# Allegro board test-bsp_01v1.brd
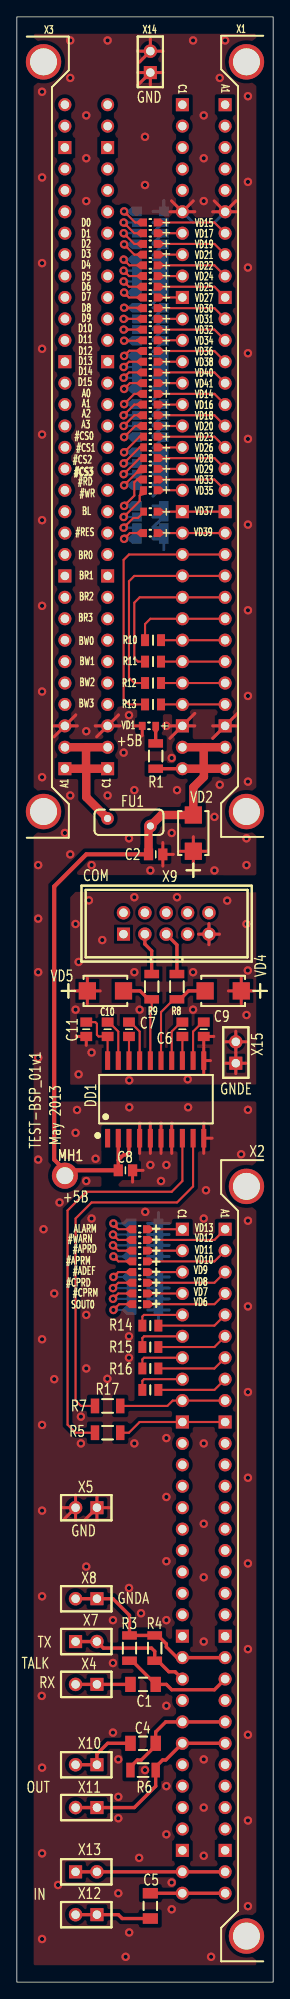
[diagram p0: board, top side]
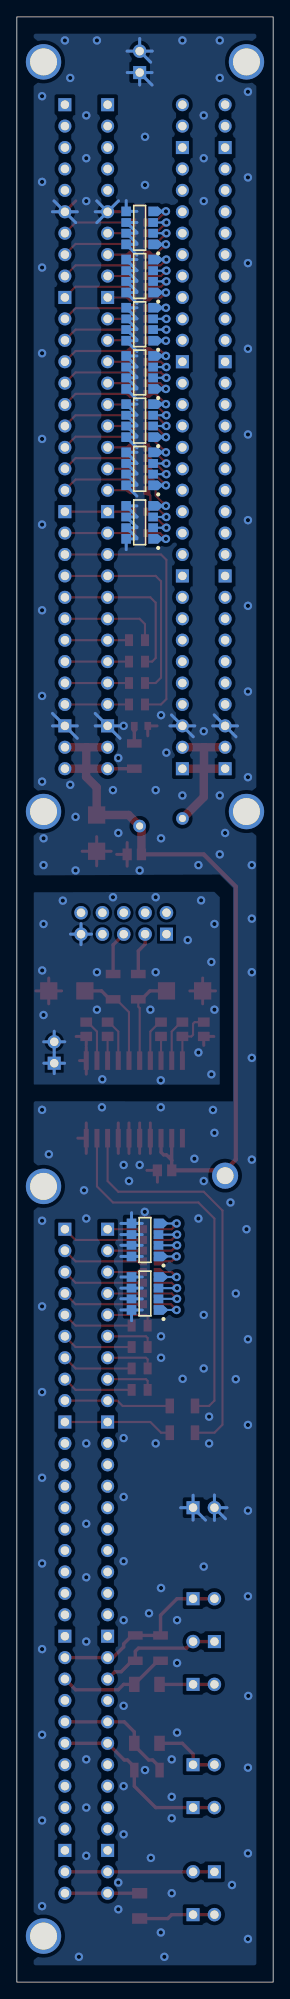
[diagram p1: board, bottom side, seen from below]

Outline 30.48 x 233.04 mm; copper layers: TOP, BOTTOM. Coordinates in mm from the lower left corner of the outline.
Outline path: rectangle 0,0 30.48,233.04

## Placement (name value [footprint] x y rotation side)
C1  10,0u  [CAPC3216X180N]  15.01 35.31 180 top
C2  0,1u  [CAPC2013X95N]  16.51 133.73 0 top
C4  1,0u  [CAPC3216X95N]  15.01 28.32 180 top
C5  1,0u  [CAPC3216X95N]  15.88 9.04 270 top
C6  0,1u  [CAPC2013X95N]  19.69 112.99 270 top
C7  0,1u  [CAPC2013X95N]  13.34 112.99 90 top
C8  0,1u  [CAPC2013X95N]  12.92 96.27 0 top
C9  0,1u  [CAPC2013X95N]  22.23 112.99 270 top
C10  0,1u  [CAPC2013X95N]  10.79 112.99 270 top
C11  0,1u  [CAPC2013X95N]  8.25 112.99 270 top
DD1  ADM3251  [SOIC127P1032X265-20]  10.79 100.08 0 top
FU1  1.1A  [FUSRR510W50L820T300H1400USR]  13.34 137.54 0 top
MH1  +48B  [MTG_180_310]  5.71 95.63 90 top
R1  1k  [RESC3116X65N]  16.51 145.39 90 top
R3  1k  [RESC3116X65N]  13.4 39.61 270 top
R4  1k  [RESC3116X65N]  16.4 39.61 270 top
R5  510  [RESC3116X65N]  10.79 65.15 0 top
R6  1k  [RESC3116X65N]  15.01 25.15 180 top
R7  100  [RESC3116X65N]  10.79 68.33 0 top
R8  100  [RESC3116X65N]  19.04 118.04 270 top
R9  100  [RESC3116X65N]  16.04 118.04 270 top
R10  100  [RESC2013X60N]  16.2 159.13 180 top
R11  100  [RESC2013X60N]  16.2 156.59 180 top
R12  100  [RESC2013X60N]  16.2 154.05 180 top
R13  100  [RESC2013X60N]  16.2 151.51 180 top
R14  100  [RESC2013X60N]  15.88 77.85 0 top
R15  100  [RESC2013X60N]  15.88 75.31 0 top
R16  100  [RESC2013X60N]  15.88 72.77 0 top
R17  100  [RESC2013X60N]  15.88 70.23 0 top
RR3  4.7k  [RESCAX127P320X508X70-8N]  15.24 81.66 0 bottom
RR4  4.7k  [RESCAX127P320X508X70-8N]  15.24 88.01 0 bottom
RR5  4.7k  [RESCAX127P320X508X70-8N]  15.88 185.17 0 bottom
RR6  4.7k  [RESCAX127P320X508X70-8N]  15.88 208.03 0 bottom
RR7  4.7k  [RESCAX127P320X508X70-8N]  15.88 202.31 0 bottom
RR8  4.7k  [RESCAX127P320X508X70-8N]  15.88 179.45 0 bottom
RR9  4.7k  [RESCAX127P320X508X70-8N]  15.88 196.6 0 bottom
RR10  4.7k  [RESCAX127P320X508X70-8N]  15.88 173.1 0 bottom
RR11  4.7k  [RESCAX127P320X508X70-8N]  15.88 190.88 0 bottom
VD1  green  [LEDC1608X110N]  15.71 148.97 0 top
VD2  6.8B  [DIOM5236X261N]  20.99 136.25 270 top
VD4  18B  [DIOM5236X261N]  24.54 117.54 0 top
VD5  18B  [DIOM5236X261N]  10.54 117.54 180 top
VD6  green  [LEDC1608X110N]  14.61 80.39 0 top
VD7  green  [LEDC1608X110N]  14.61 81.66 0 top
VD8  green  [LEDC1608X110N]  14.61 82.93 0 top
VD9  green  [LEDC1608X110N]  14.61 84.2 0 top
VD10  green  [LEDC1608X110N]  14.61 85.47 0 top
VD11  green  [LEDC1608X110N]  14.61 86.74 0 top
VD12  green  [LEDC1608X110N]  14.61 88.01 0 top
VD13  green  [LEDC1608X110N]  14.61 89.28 0 top
VD14  green  [LEDC1608X110N]  15.88 188.34 0 top
VD15  green  [LEDC1608X110N]  15.88 208.66 0 top
VD16  green  [LEDC1608X110N]  15.88 187.07 0 top
VD17  green  [LEDC1608X110N]  15.88 207.39 0 top
VD18  green  [LEDC1608X110N]  15.88 185.8 0 top
VD19  green  [LEDC1608X110N]  15.88 206.12 0 top
VD20  green  [LEDC1608X110N]  15.88 184.53 0 top
VD21  green  [LEDC1608X110N]  15.88 204.85 0 top
VD22  green  [LEDC1608X110N]  15.88 203.58 0 top
VD23  green  [LEDC1608X110N]  15.88 183.26 0 top
VD24  green  [LEDC1608X110N]  15.88 202.31 0 top
VD25  green  [LEDC1608X110N]  15.88 201.04 0 top
VD26  green  [LEDC1608X110N]  15.88 181.99 0 top
VD27  green  [LEDC1608X110N]  15.88 199.77 0 top
VD28  green  [LEDC1608X110N]  15.88 180.72 0 top
VD29  green  [LEDC1608X110N]  15.88 179.45 0 top
VD30  green  [LEDC1608X110N]  15.88 198.5 0 top
VD31  green  [LEDC1608X110N]  15.88 197.23 0 top
VD32  green  [LEDC1608X110N]  15.88 195.96 0 top
VD33  green  [LEDC1608X110N]  15.88 178.18 0 top
VD34  green  [LEDC1608X110N]  15.88 194.69 0 top
VD35  green  [LEDC1608X110N]  15.88 176.91 0 top
VD36  green  [LEDC1608X110N]  15.88 193.42 0 top
VD37  green  [LEDC1608X110N]  15.88 174.37 0 top
VD38  green  [LEDC1608X110N]  15.88 192.15 0 top
VD39  green  [LEDC1608X110N]  15.88 171.83 0 top
VD40  green  [LEDC1608X110N]  15.88 190.88 0 top
VD41  green  [LEDC1608X110N]  15.88 189.61 0 top
X1  DIN-32x2FR  [DIN_41612_64_FR]  27.94 183.26 180 top
X2  DIN-32x2FR  [DIN_41612_64_FR]  27.94 49.91 180 top
X3  DIN-32x2  [DIN_41612_64_MR]  2.54 183.26 0 top
X4  RxTalk  [HDRV1X2P254]  8.25 35.31 180 top
X5  GND  [HDRV1X2P254]  8.25 56.26 180 top
X7  TxTalk  [HDRV1X2P254]  8.25 40.39 0 top
X8  GNDA  [HDRV1X2P254]  8.25 45.47 180 top
X9  IDC-10M  [IDC_10M]  17.77 125.54 90 top
X10  BSP_OUT+  [HDRV1X2P254]  8.25 25.78 180 top
X11  BSP_OUT-  [HDRV1X2P254]  8.25 20.7 180 top
X12  BSP_IN-  [HDRV1X2P254]  8.25 8 180 top
X13  BSP_IN+  [HDRV1X2P254]  8.25 13.08 0 top
X14  PLS-2  [HDRV1X2P254]  15.88 227.71 90 top
X15  PLS-2  [HDRV1X2P254]  26.04 110.24 90 top

## Library data of the parts
C1 C2 C4-C11 = CAP_NP
DD1 = ADM3251_RW20
FU1 = FUSE_LEAD
MH1 = MOUNTING_HOLE_PLATED
R1 R3-R9 = RES_0.25W
R10-R17 = RES_0.125W
RR3-RR11 = RES_ARRAY_4
VD1 VD6-VD41 = DIODE_LED
VD2 = DIODE_TVS_UNI
VD4 VD5 = DIODE_TVS_BI
X1 X2 = CON_32X2
X3 = CON_32x2
X4 X5 X7 X8 X10-X15 = CON_2
X9 = CON_10

## Footprints (pads in the part's own frame, mm; a bottom-side part is the same pattern mirrored in y, then rotated)
CAPC2013X95N
  rect 1.1x1.4 smd: 1(-0.85,0) 2(0.85,0)
CAPC3216X95N
  rect 1.25x1.8 smd: 1(-1.5,0) 2(1.5,0)
CAPC3216X180N
  rect 1.25x1.8 smd: 1(-1.5,0) 2(1.5,0)
DIN_41612_64_FR
  rect 1.55x1.55 hole 1: A1(3.175,-39.37) A10(3.175,-16.51) A20(3.175,8.89) A30(3.175,34.29) C1(8.255,-39.37) C10(8.255,-16.51) C20(8.255,8.89) C30(8.255,34.29)
  round 1.55 hole 1: A2(3.175,-36.83) A3(3.175,-34.29) A4(3.175,-31.75) A5(3.175,-29.21) A6(3.175,-26.67) A7(3.175,-24.13) A8(3.175,-21.59) A9(3.175,-19.05) A11(3.175,-13.97) A12(3.175,-11.43) A13(3.175,-8.89) A14(3.175,-6.35) A15(3.175,-3.81) A16(3.175,-1.27) A17(3.175,1.27) A18(3.175,3.81) A19(3.175,6.35) A21(3.175,11.43) A22(3.175,13.97) A23(3.175,16.51) A24(3.175,19.05) A25(3.175,21.59) A26(3.175,24.13) A27(3.175,26.67) A28(3.175,29.21) A29(3.175,31.75) A31(3.175,36.83) A32(3.175,39.37) C2(8.255,-36.83) C3(8.255,-34.29) C4(8.255,-31.75) C5(8.255,-29.21) C6(8.255,-26.67) C7(8.255,-24.13) C8(8.255,-21.59) C9(8.255,-19.05) C11(8.255,-13.97) C12(8.255,-11.43) C13(8.255,-8.89) C14(8.255,-6.35) C15(8.255,-3.81) C16(8.255,-1.27) C17(8.255,1.27) C18(8.255,3.81) C19(8.255,6.35) C21(8.255,11.43) C22(8.255,13.97) C23(8.255,16.51) C24(8.255,19.05) C25(8.255,21.59) C26(8.255,24.13) C27(8.255,26.67) C28(8.255,29.21) C29(8.255,31.75) C31(8.255,36.83) C32(8.255,39.37)
  round 4.2 hole 3.2: HOLE1(0.635,-44.45) HOLE2(0.635,44.45)
DIN_41612_64_MR
  rect 1.55x1.55 hole 1: A1(3.175,-39.37) A10(3.175,-16.51) A20(3.175,8.89) A30(3.175,34.29) C1(8.255,-39.37) C10(8.255,-16.51) C20(8.255,8.89) C30(8.255,34.29)
  round 1.55 hole 1: A2(3.175,-36.83) A3(3.175,-34.29) A4(3.175,-31.75) A5(3.175,-29.21) A6(3.175,-26.67) A7(3.175,-24.13) A8(3.175,-21.59) A9(3.175,-19.05) A11(3.175,-13.97) A12(3.175,-11.43) A13(3.175,-8.89) A14(3.175,-6.35) A15(3.175,-3.81) A16(3.175,-1.27) A17(3.175,1.27) A18(3.175,3.81) A19(3.175,6.35) A21(3.175,11.43) A22(3.175,13.97) A23(3.175,16.51) A24(3.175,19.05) A25(3.175,21.59) A26(3.175,24.13) A27(3.175,26.67) A28(3.175,29.21) A29(3.175,31.75) A31(3.175,36.83) A32(3.175,39.37) C2(8.255,-36.83) C3(8.255,-34.29) C4(8.255,-31.75) C5(8.255,-29.21) C6(8.255,-26.67) C7(8.255,-24.13) C8(8.255,-21.59) C9(8.255,-19.05) C11(8.255,-13.97) C12(8.255,-11.43) C13(8.255,-8.89) C14(8.255,-6.35) C15(8.255,-3.81) C16(8.255,-1.27) C17(8.255,1.27) C18(8.255,3.81) C19(8.255,6.35) C21(8.255,11.43) C22(8.255,13.97) C23(8.255,16.51) C24(8.255,19.05) C25(8.255,21.59) C26(8.255,24.13) C27(8.255,26.67) C28(8.255,29.21) C29(8.255,31.75) C31(8.255,36.83) C32(8.255,39.37)
  round 4.2 hole 3.2: HOLE1(0.635,-44.45) HOLE2(0.635,44.45)
DIOM5236X261N
  rect 2.05x2.05 smd: A(2.15,0) C(-2.15,0)
FUSRR510W50L820T300H1400USR
  round 1.5 hole 0.85: 1(-2.55,0.45) 2(2.55,-0.45)
HDRV1X2P254
  rect 1.55x1.55 hole 1: 1(-1.27,0)
  round 1.6 hole 1: 2(1.27,0)
IDC_10M
  rect 1.55x1.55 hole 1: 1(-1.27,5.08)
  round 1.6 hole 1: 2(1.27,5.08) 3(-1.27,2.54) 4(1.27,2.54) 5(-1.27,0) 6(1.27,0) 7(-1.27,-2.54) 8(1.27,-2.54) 9(-1.27,-5.08) 10(1.27,-5.08)
LEDC1608X110N
  rect 0.8x0.95 smd: A(0.8,0) C(-0.8,0)
MTG_180_310
  round 3.1 hole 2: 1(0,0)
RESC2013X60N
  rect 0.95x1.4 smd: 1(-0.95,0) 2(0.95,0)
RESC3116X65N
  rect 1x1.75 smd: 1(-1.5,0) 2(1.5,0)
RESCAX127P320X508X70-8N
  rect 1.15x1.15 smd: 1(-1.6,1.955) 4(-1.6,-1.955) 5(1.6,-1.955) 8(1.6,1.955)
  rect 1.15x1.05 smd: 2(-1.6,0.635) 3(-1.6,-0.635) 6(1.6,-0.635) 7(1.6,0.635)
SOIC127P1032X265-20
  rect 0.6x2.2 smd: 1(0,0) 2(1.27,0) 3(2.54,0) 4(3.81,0) 5(5.08,0) 6(6.35,0) 7(7.62,0) 8(8.89,0) 9(10.16,0) 10(11.43,0) 11(11.43,9.2) 12(10.16,9.2) 13(8.89,9.2) 14(7.62,9.2) 15(6.35,9.2) 16(5.08,9.2) 17(3.81,9.2) 18(2.54,9.2) 19(1.27,9.2) 20(0,9.2)

## Nets
+5VCC: FU1.1 X3.A1 X3.A2 X3.C1 X3.C2
GND: C2.2 C8.2 DD1.4(GND#0) DD1.5(GND#1) DD1.6(GND#2) DD1.7(GND#3) DD1.10(GND#4) RR3.5 RR3.6 RR3.7 RR3.8 RR4.5 RR4.6 RR4.7 RR4.8 RR5.5 RR5.6 RR5.7 RR5.8 RR6.5 RR6.6 RR6.7 RR6.8 RR7.5 RR7.6 RR7.7 RR7.8 RR8.5 RR8.6 RR8.7 RR8.8 RR9.5 RR9.6 RR9.7 RR9.8 RR10.5 RR10.6 RR10.7 RR10.8 RR11.5 RR11.6 RR11.7 RR11.8 VD1.C VD2.A X1.A6 X1.A30 X1.C6 X1.C30 X3.A3 X3.C3 X5.1 X5.2 X14.1 X14.2
GNDA: R3.1 R4.1 X2.A21 X2.C21 X8.1 X8.2
GNDE: C9.2 C11.2 DD1.11(GNDISO) VD4.A VD5.A X9.9 X15.1 X15.2
#ADEF: VD9.A X2.C3
#APRD: VD11.A X2.C2
#APRM: VD10.A X2.A2
#CPRD: VD8.A X2.A3
#CPRM: VD7.A X2.C4
#CS0: VD23.A X1.A17
#CS1: VD26.A X1.C17
#CS2: VD28.A X1.A18
#CS3: VD29.A X1.C18
#RD: VD33.A X1.A19
#RES: VD39.A X1.A21 X1.C21
#TALKI: R17.2 X2.A8
#TALKO: R17.1 X2.C8
#WARN: VD12.A X2.A1
#WR: VD35.A X1.C19
+5B: C2.1 C8.1 DD1.2(VCC#0) DD1.3(VCC#1) FU1.2 MH1.1 R1.1 VD2.C X1.A31 X1.A32 X1.C31 X1.C32
A0: VD14.A X1.A15
A1: VD16.A X1.C15
A2: VD18.A X1.A16
A3: VD20.A X1.C16
ALARM: VD13.A X2.C1
BL: VD37.A X1.A20 X1.C20
BUSR0: R13.2 X1.A22 X1.C22
BUSR1: R12.2 X1.A23 X1.C23
BUSR2: R11.2 X1.A24 X1.C24
BUSR3: R10.2 X1.A25 X1.C25
BUSR4: R14.2 X2.A5
BUSR5: R15.2 X2.A6
BUSR6: R16.2 X2.A7
BUSW0: R10.1 X1.A26 X1.C26
BUSW1: R11.1 X1.A27 X1.C27
BUSW2: R12.1 X1.A28 X1.C28
BUSW3: R13.1 X1.A29 X1.C29
BUSW4: R14.1 X2.C5
BUSW5: R15.1 X2.C6
BUSW6: R16.1 X2.C7
D0: VD15.A X1.A7
D1: VD17.A X1.C7
D2: VD19.A X1.A8
D3: VD21.A X1.C8
D4: VD22.A X1.A9
D5: VD24.A X1.C9
D6: VD25.A X1.A10
D7: VD27.A X1.C10
D8: VD30.A X1.A11
D9: VD31.A X1.C11
D10: VD32.A X1.A12
D11: VD34.A X1.C12
D12: VD36.A X1.A13
D13: VD38.A X1.C13
D14: VD40.A X1.A14
D15: VD41.A X1.C14
IO1: C4.1 R6.2 X2.A24 X2.C24
IO2: R6.1 X2.A25 X2.C25 X11.1 X11.2
IO3: X2.A31 X2.C31 X13.1 X13.2
IO4: C5.1 X2.A32 X2.C32
RXD: R9.1 X9.3
RXTALK: C1.1 R3.2 X2.A22
RXUM: R5.2 X2.A10 X2.C10
SOUT0: VD6.A X2.A4
TXD: R8.1 X9.5
TXTALK: R4.2 X2.C22 X7.1 X7.2
TXUM: R7.2 X2.A9 X2.C9
N70867: DD1.15(RIN) R8.2 VD4.C
N70871: DD1.16(TOUT) R9.2 VD5.C
N70875: C6.1 DD1.14(C2+)
N70879: C6.2 DD1.13(C2-)
N70891: C7.1 DD1.18(C1+)
N70911: C7.2 DD1.17(C1-)
N70923: C9.1 DD1.12(V-)
N70931: C10.1 DD1.19(V+)
N70935: C10.2 C11.1 DD1.20(VISO)
N138210: DD1.8(ROUT) R5.1
N138266: DD1.9(TIN) R7.1
N147373: R1.2 VD1.A
N150163: C5.2 X12.1 X12.2
N150323: C4.2 X10.1 X10.2
N151125: C1.2 X4.1 X4.2
N167535: RR3.1 VD6.C
N167547: RR3.2 VD7.C
N167559: RR3.3 VD8.C
N167571: RR3.4 VD9.C
N167911: RR4.1 VD10.C
N167923: RR4.2 VD11.C
N167938: RR4.3 VD12.C
N167950: RR4.4 VD13.C
N180484: RR10.4 VD33.C
N180508: RR10.2 VD37.C
N180520: RR10.1 VD39.C
N181317: RR8.4 VD23.C
N181329: RR8.3 VD26.C
N181341: RR8.2 VD28.C
N181353: RR8.1 VD29.C
N182020: RR10.3 VD35.C
N182831: RR5.4 VD14.C
N182843: RR5.3 VD16.C
N182855: RR5.2 VD18.C
N182867: RR5.1 VD20.C
N184296: RR6.4 VD15.C
N184308: RR6.3 VD17.C
N184320: RR6.2 VD19.C
N184332: RR6.1 VD21.C
N186118: RR7.4 VD22.C
N186130: RR7.3 VD24.C
N186142: RR7.2 VD25.C
N186154: RR7.1 VD27.C
N187066: RR9.4 VD30.C
N187078: RR9.3 VD31.C
N187090: RR9.1 VD34.C
N187102: RR9.2 VD32.C
N188421: RR11.4 VD36.C
N188433: RR11.3 VD38.C
N188446: RR11.2 VD40.C
N188461: RR11.1 VD41.C

Pads without a net: DD1 1; X1 A1 A2 A3 A4 A5 C1 C2 C3 C4 C5 HOLE1 HOLE2; X2 A11 A12 A13 A14 A15 A16 A17 A18 A19 A20 A23 A26 A27 A28 A29 A30 C11 C12 C13 C14 C15 C16 C17 C18 C19 C20 C23 C26 C27 C28 C29 C30 HOLE1 HOLE2; X3 A4 A5 A6 A7 A8 A9 A10 A11 A12 A13 A14 A15 A16 A17 A18 A19 A20 A21 A22 A23 A24 A25 A26 A27 A28 A29 A30 A31 A32 C4 C5 C6 C7 C8 C9 C10 C11 C12 C13 C14 C15 C16 C17 C18 C19 C20 C21 C22 C23 C24 C25 C26 C27 C28 C29 C30 C31 C32 HOLE1 HOLE2; X9 1 2 4 6 7 8 10

## Via types
v1: diameter 1, hole 0.5, TOP to BOTTOM, 188 vias

## Routing (per net, layer and track width the routed paths; a pad name or vN(x,y) marks a point on that pad's centre or on a via; arc(x,y) is an arc through that point)
+5VCC: length 19.7
  TOP w1: 8.23,143.89 8.23,146.43 ; 8.23,143.89 X3.A1 ; 8.23,143.89 X3.C1 ; 8.23,143.89 8.25,143.87 8.25,140.52 FU1.1 ; 8.23,146.43 X3.C2 ; 8.23,146.43 X3.A2
GND: length 275.4
  TOP w0.353: DD1.10 22.23,101.88 ; DD1.10 22.23,98.27 ; DD1.10 23.23,100.08 ; X5.1 9.53,57.74 ; X5.1 9.53,54.78 ; X5.1 8.05,54.78 ; X5.1 11,56.26 ; X14.2 15.88,230.48 ; X14.2 17.38,228.98 ; X14.2 14.37,228.98 ; X14.2 14.56,227.67 ; 15.88,98.27 DD1.5 15.88,101.88 ; 19.26,134.1 VD2.A ; VD2.A 20.99,132.37 ; VD2.A 22.71,134.1 ; VD2.A 20.99,135.83 ; 15.02,96.27 C8.2 13.77,94.86 ; X1.A30 26.24,148.97 ; X1.A30 23.29,148.97 ; X1.A30 23.29,147.49 ; X1.A30 26.24,150.45 ; 6.98,54.76 X5.2 ; X5.2 6.98,57.76 ; X5.2 5.48,56.26 ; X5.2 5.67,54.95 ; X1.C30 21.16,148.97 ; X1.C30 21.16,150.45 ; X1.C30 18.21,148.97 ; X1.C30 18.21,147.49 ; 17.36,133.73 17.36,135.13 ; 17.36,133.73 18.61,133.73 ; 17.36,133.73 17.36,132.33 ; 23.29,209.93 X1.A6 ; X1.A6 26.24,209.93 ; X1.A6 26.06,211.22 ; X1.A6 23.47,211.22 ; 17.14,98.27 DD1.6 17.14,101.88 ; X3.C3 12.27,148.97 ; X3.C3 9.32,148.97 ; X3.C3 9.5,147.68 ; X3.C3 12.09,150.26 ; X14.1 17.35,226.44 ; X14.1 14.4,224.96 ; X14.1 14.4,226.44 ; X14.1 15.88,224.96 ; X1.C6 21.16,209.93 ; X1.C6 18.39,211.22 ; X1.C6 18.21,209.93 ; X1.C6 20.98,211.22 ; 18.41,101.88 DD1.7 18.41,98.27 ; X3.A3 7.01,150.26 ; X3.A3 7.19,148.97 ; X3.A3 4.42,147.68 ; X3.A3 4.24,148.97 ; 13.81,148.97 VD1.C 14.91,147.79 ; 14.61,98.27 DD1.4 14.61,101.88
  BOTTOM w0.353: 15.56,86.06 18.12,86.06 ; X1.A6 26.24,209.93 ; X1.A6 23.47,208.64 ; X1.A6 23.29,209.93 ; X1.A6 26.06,211.22 ; X3.C3 12.09,150.26 ; X3.C3 9.5,147.68 ; X3.C3 12.27,148.97 ; X3.C3 9.32,148.97 ; 16.2,191.52 RR11.6 16.2,190.35 ; X14.1 17.35,226.44 ; X14.1 14.4,226.44 ; X14.1 14.4,224.96 ; X14.1 15.88,224.96 ; X1.A30 26.24,148.97 ; X1.A30 26.24,150.45 ; X1.A30 23.29,148.97 ; X1.A30 23.29,147.49 ; 16.2,209.98 RR6.5 17.48,211.26 ; X5.1 9.53,57.74 ; X5.1 11,56.26 ; X5.1 9.53,54.78 ; X5.1 8.05,54.78 ; X5.2 6.98,57.76 ; X5.2 5.48,56.26 ; X5.2 6.98,54.76 ; X5.2 5.67,54.95 ; 16.2,188.93 RR11.8 16.2,187.65 ; 16.2,178.82 RR8.7 16.2,177.65 ; 16.2,206.22 RR6.7 16.2,207.39 ; X1.C30 21.16,150.45 ; X1.C30 21.16,148.97 ; X1.C30 18.21,148.97 ; X1.C30 18.21,147.49 ; 16.2,185.8 RR5.6 16.2,184.63 ; 16.2,187.12 RR5.5 16.2,185.84 ; 18.39,211.22 X1.C6 ; X1.C6 21.16,209.93 ; X1.C6 20.98,208.64 ; X1.C6 20.98,211.22 ; X3.A3 7.19,148.97 ; X3.A3 4.42,147.68 ; X3.A3 7.01,150.26 ; X3.A3 4.24,148.97 ; 16.2,184.53 RR5.7 16.2,183.37 ; 16.2,202.95 RR7.6 16.2,201.78 ; 15.56,81.03 18.12,81.03 ; 16.84,78.43 16.84,79.71 ; 16.84,79.71 18.12,79.71 ; 16.84,79.71 15.56,79.71 ; 18.12,82.3 15.56,82.3 ; 16.2,180.13 RR8.5 16.2,181.41 ; 16.2,183.21 RR5.8 16.2,181.93 ; 16.2,171.15 RR10.8 17.48,169.87 ; 16.2,177.5 17.48,177.5 16.2,176.22 ; 16.2,204.79 RR6.8 16.2,206.07 ; 16.2,190.25 RR11.7 16.2,189.08 ; 16.2,180.09 RR8.6 16.2,178.92 ; 14.56,227.67 X14.2 ; X14.2 17.38,228.98 ; X14.2 15.88,230.48 ; X14.2 14.37,228.98 ; 16.2,173.78 RR10.5 16.2,175.06 ; 16.2,194.64 RR9.8 16.2,193.36 ; 16.2,198.55 RR9.5 16.2,197.27 ; 16.2,192.84 RR11.5 16.2,191.56 ; 16.2,196.06 RR9.6 16.2,197.23 ; 16.2,172.47 RR10.7 16.2,171.3 ; 16.2,202.99 17.48,204.27 16.2,204.27 ; 16.2,201.68 RR7.7 16.2,200.51 ; 16.2,208.66 RR6.6 16.2,207.5 ; 16.84,89.97 16.84,91.24 ; 16.84,89.97 18.12,89.97 ; 16.84,89.97 15.56,89.97 ; 18.12,88.65 15.56,88.65 ; 15.56,83.62 18.12,83.62 ; 15.56,87.38 18.12,87.38 ; 16.2,194.79 RR9.7 16.2,195.96 ; 16.2,172.57 RR10.6 16.2,173.74 ; 16.2,200.36 RR7.8 16.2,199.08
  vias: v1(2.54,132.46) v1(2.54,126.11) v1(2.54,119.76) v1(2.54,109.6) v1(2.54,97.54) v1(3,224.16) v1(3,214) v1(3,203.84) v1(3,193.68) v1(3,183.52) v1(3,173.36) v1(3,163.2) v1(3,153.04) v1(3,142.88) v1(3,76.23) v1(3,66.07) v1(3,55.91) v1(3,45.75) v1(2.96,33.94) v1(3,25.43) v1(3,15.27) v1(3,5.11) v1(3.18,89.28) v1(4.45,81.66) v1(4.45,71.5) v1(4.9,11.52) v1(5.08,92.46) v1(5.71,136.27) v1(6.35,230.25) v1(6.35,225.81) v1(6.35,140.72) v1(6.35,133.73) v1(6.98,100.71) v1(7.16,103.42) v1(7.62,67.06) v1(7.62,63.88) v1(8.25,221.36) v1(8.25,216.28) v1(8.25,211.2) v1(8.25,148.34) v1(8.25,95) v1(8.25,79.12) v1(8.25,72.77) v1(8.25,49.28) v1(8.89,132.46) v1(8.89,90.55) v1(9.37,97.64) v1(10.79,230.25) v1(10.79,140.72) v1(10.77,71.54) v1(11.43,42.93) v1(11.43,37.85) v1(11.43,29.59) v1(12.07,26.42) v1(12.07,21.97) v1(12.07,19.43) v1(12.07,10.54) v1(12.7,145.8) v1(12.94,3) v1(13.34,150.24) v1(13.34,135.64) v1(13.37,103.74) v1(13.34,76.58) v1(13.34,74.04) v1(13.34,46.74) v1(13.36,5.89) v1(13.97,141.35) v1(13.97,63.88) v1(14.54,14.73) v1(14.77,43.74) v1(15.24,218.82) v1(15.24,213.11) v1(15.27,91.34) v1(15.24,25.15) v1(15.88,131.83) v1(15.88,96.9) v1(17.14,95) v1(17.78,148.97) v1(17.78,96.9) v1(17.78,64.52) v1(17.78,57.53) v1(17.78,49.91) v1(17.78,42.93) v1(17.78,32.77) v1(17.78,23.24) v1(17.78,17.53) v1(18.41,145.16) v1(18.41,136.27) v1(18.41,11.81) v1(18.41,8.64) v1(19.05,141.35) v1(20.37,103.74) v1(20.96,230.25) v1(22.23,221.36) v1(22.23,216.28) v1(22.23,211.2) v1(22.23,90.55) v1(22.23,63.88) v1(22.23,54.36) v1(22.23,48.01) v1(22.23,40.39) v1(22.23,26.42) v1(22.23,20.7) v1(22.23,14.99) v1(22.49,93.9) v1(23.1,3) v1(23.5,138.18) v1(23.5,131.83) v1(24.13,225.81) v1(24.13,141.99) v1(24.77,230.25) v1(26.67,98.17) v1(27.3,135.64) v1(27.3,132.46) v1(27.48,223.64) v1(27.48,213.48) v1(27.48,203.32) v1(27.48,193.16) v1(27.48,183) v1(27.48,172.84) v1(27.48,162.68) v1(27.48,152.52) v1(27.48,142.36) v1(27.48,103.44) v1(27.48,90.29) v1(27.48,80.13) v1(27.48,69.97) v1(27.48,59.81) v1(27.48,49.65) v1(27.48,39.49) v1(27.48,29.33) v1(27.48,19.17) v1(27.48,9.01)
GNDA: length 22.3
  TOP w0.4: X8.2 X8.1 11.43,45.47 13.4,43.5 R3.1 R4.1 16.77,41.11 17.78,40.1 17.78,39.75 19.05,38.48 X2.C21 X2.A21
GNDE: length 50.6
  TOP w0.353: 22.84,123.02 X9.9 ; X9.9 24.1,124.27 ; X9.9 21.59,124.27 ; X9.9 22.84,125.52 ; X15.2 26.04,112.76 ; X15.2 27.29,111.51 ; X15.2 26.04,110.25 ; X15.2 24.78,111.51 ; VD4.A 28.21,117.54 ; VD4.A 26.69,119.07 ; VD4.A 26.69,116.01 ; VD4.A 25.16,117.54 ; X15.1 27.26,108.97 ; X15.1 26.04,110.19 ; X15.1 26.04,107.74 ; X15.1 24.81,108.97 ; 6.86,117.54 VD5.A ; VD5.A 8.39,116.01 ; VD5.A 8.39,119.07 ; VD5.A 9.91,117.54 ; DD1.11 23.03,109.28 ; DD1.11 22.23,107.67 ; DD1.11 22.23,110.88 ; 22.23,111.09 C9.2 23.43,112.14 ; 8.25,111.09 C11.2 7.05,112.14
  BOTTOM w0.353: X15.1 27.26,108.97 ; X15.1 26.04,107.74 ; X15.1 24.81,108.97 ; X15.1 26.04,110.19 ; 21.59,124.27 X9.9 ; X9.9 22.84,123.02 ; X9.9 22.84,125.52 ; X9.9 24.1,124.27 ; 24.78,111.51 X15.2 ; X15.2 26.04,110.25 ; X15.2 27.29,111.51 ; X15.2 26.04,112.76
  vias: v1(6.98,125.48) v1(6.98,115.32) v1(7.35,120.97) v1(7.35,107.65) v1(8.57,128.28) v1(8.89,110.24) v1(10.16,123.57) v1(13.37,106.94) v1(13.97,128.65) v1(13.97,119.76) v1(14.61,115.32) v1(19.05,128.65) v1(20.32,107.06) v1(20.96,119.76) v1(20.96,115.32) v1(25.01,128.25) v1(27.3,125.48) v1(27.3,114.68) v1(27.46,119.97)
#ADEF: length 4.3
  TOP w0.25: VD9.A X2.C3
#APRD: length 4.3
  TOP w0.25: VD11.A X2.C2
#APRM: length 9.9
  TOP w0.25: VD10.A 23.5,85.47 X2.A2
#CPRD: length 9.9
  TOP w0.25: X2.A3 23.5,82.93 VD8.A
#CPRM: length 4.3
  TOP w0.25: VD7.A X2.C4
#CS0: length 8.6
  TOP w0.25: X1.A17 23.5,183.26 VD23.A
#CS1: length 3
  TOP w0.25: VD26.A X1.C17
#CS2: length 8.6
  TOP w0.25: X1.A18 23.5,180.72 VD28.A
#CS3: length 3
  TOP w0.25: VD29.A X1.C18
#RD: length 8.6
  TOP w0.25: VD33.A 23.5,178.18 X1.A19
#RES: length 8.1
  TOP w0.25: VD39.A X1.C21 X1.A21
#TALKI: length 8.5
  TOP w0.25: X2.A8 23.5,70.23 R17.2
#TALKO: length 5.9
  TOP w0.25: X2.C8 15.12,71.5 14.93,71.31 R17.1
#WARN: length 9.9
  TOP w0.25: VD12.A 23.5,88.01 X2.A1
#WR: length 3
  TOP w0.25: VD35.A X1.C19
+5B: length 92.4
  TOP w0.4: 12.07,97.46 C8.1 ; 12.07,97.46 DD1.2 ; 12.07,97.46 12.7,98.1 13.02,98.1 13.34,98.41 DD1.3 ; X1.C32 R1.1
  TOP w0.5: C2.1 8.25,133.73 4.45,129.92 4.45,97.54 5.71,96.27 MH1.1 6.35,96.27 C8.1
  TOP w1: X1.C32 22.22,143.89 ; 22.22,143.89 22.22,146.43 ; 22.22,143.89 X1.A32 ; 22.22,143.89 22.24,143.87 22.24,142.94 20.99,141.68 VD2.C 17.2,138.4 FU1.2 15.66,136.87 C2.1 ; 22.22,146.43 X1.C31 ; 22.22,146.43 X1.A31
A0: length 8.6
  TOP w0.25: VD14.A 23.5,188.34 X1.A15
A1: length 3
  TOP w0.25: VD16.A X1.C15
A2: length 8.6
  TOP w0.25: X1.A16 23.5,185.8 VD18.A
A3: length 3
  TOP w0.25: VD20.A X1.C16
ALARM: length 4.3
  TOP w0.25: VD13.A X2.C1
BL: length 8.1
  TOP w0.25: VD37.A X1.C20 X1.A20
BUSR0: length 31.6
  TOP w0.25: R13.2 13.34,151.51 12.7,152.15 12.7,168.66 13.34,169.29 X1.C22 X1.A22
BUSR1: length 25.3
  TOP w0.25: R12.2 13.97,154.05 13.34,154.69 13.34,166.12 13.97,166.75 X1.C23 X1.A23
BUSR2: length 19.1
  TOP w0.25: X1.A24 X1.C24 14.61,164.21 13.97,163.58 13.97,157.01 14.39,156.59 R11.2
BUSR3: length 11.7
  TOP w0.25: X1.A25 X1.C25 15.88,161.67 15.25,161.04 R10.2
BUSR4: length 8.5
  TOP w0.25: X2.A5 23.5,77.85 R14.2
BUSR5: length 8.5
  TOP w0.25: R15.2 23.5,75.31 X2.A6
BUSR6: length 8.5
  TOP w0.25: X2.A7 23.5,72.77 R16.2
BUSW0: length 7.6
  TOP w0.25: X1.A26 X1.C26 R10.1
BUSW1: length 7.6
  TOP w0.25: X1.A27 X1.C27 R11.1
BUSW2: length 7.6
  TOP w0.25: X1.A28 X1.C28 R12.1
BUSW3: length 7.6
  TOP w0.25: X1.A29 X1.C29 R13.1
BUSW4: length 5.9
  TOP w0.25: R14.1 14.93,78.93 15.12,79.12 X2.C5
BUSW5: length 5.9
  TOP w0.25: R15.1 14.93,76.39 15.12,76.58 X2.C6
BUSW6: length 5.9
  TOP w0.25: R16.1 14.93,73.85 15.12,74.04 X2.C7
D0: length 8.6
  TOP w0.25: VD15.A 23.5,208.66 X1.A7
D1: length 3
  TOP w0.25: VD17.A X1.C7
D2: length 8.6
  TOP w0.25: VD19.A 23.5,206.12 X1.A8
D3: length 3
  TOP w0.25: VD21.A X1.C8
D4: length 8.6
  TOP w0.25: X1.A9 23.5,203.58 VD22.A
D5: length 3
  TOP w0.25: VD24.A X1.C9
D6: length 8.6
  TOP w0.25: VD25.A 23.5,201.04 X1.A10
D7: length 3
  TOP w0.25: VD27.A X1.C10
D8: length 8.6
  TOP w0.25: X1.A11 23.5,198.5 VD30.A
D9: length 3
  TOP w0.25: VD31.A X1.C11
D10: length 8.6
  TOP w0.25: VD32.A 23.5,195.96 X1.A12
D11: length 3
  TOP w0.25: VD34.A X1.C12
D12: length 8.6
  TOP w0.25: X1.A13 23.5,193.42 VD36.A
D13: length 3
  TOP w0.25: VD38.A X1.C13
D14: length 8.6
  TOP w0.25: VD40.A 23.5,190.88 X1.A14
D15: length 3
  TOP w0.25: VD41.A X1.C14
IO1: length 14.8
  TOP w0.4: X2.A24 X2.C24 17.7,30.86 16.51,29.67 C4.1 16.51,28.05 14.8,26.34 14.33,26.34 13.51,25.52 R6.2
IO2: length 22.3
  TOP w0.4: X2.A25 X2.C25 17.7,26.34 17.33,26.34 16.51,25.52 R6.1 16.51,23.24 13.97,20.7 X11.1 X11.2
IO3: length 17.8
  TOP w0.4: X13.1 X13.2 X2.C31 X2.A31
IO4: length 8.9
  TOP w0.4: X2.A32 X2.C32 C5.1
RXD: length 5.1
  TOP w0.4: R9.1 16.04,122.28 15.23,123.09 X9.3
RXTALK: length 13.3
  TOP w0.4: X2.A22 23.5,34.67 18.41,34.67 17.78,35.31 C1.1 13.71,38.11 R3.2
RXUM: length 13
  TOP w0.25: R5.2 13.34,65.15 14.61,66.42 X2.C10 X2.A10
SOUT0: length 9.9
  TOP w0.25: VD6.A 23.5,80.39 X2.A4
TXD: length 5.3
  TOP w0.4: X9.5 19.04,123 R8.1
TXTALK: length 15.2
  TOP w0.4: X7.1 X7.2 10.3,39.61 16.02,39.61 16.4,39.23 R4.2 16.77,38.11 18.07,36.81 18.82,36.81 X2.C22
TXUM: length 12.7
  TOP w0.25: X2.A9 X2.C9 18.54,68.96 17.9,68.33 R7.2
N70867: length 12
  TOP w0.25: R8.2 18.66,116.54 17.14,115.03 DD1.15
  TOP w0.4: R8.2 19.41,116.54 20.41,117.54 VD4.C
N70871: length 11.1
  TOP w0.25: R9.2 16.04,115.66 15.88,115.5 DD1.16
  TOP w0.4: VD5.C 14.66,117.54 15.66,116.54 R9.2
N70875: length 5.2
  TOP w0.25: C6.1 19.54,113.84 18.41,112.72 DD1.14
N70879: length 2.9
  TOP w0.25: DD1.13 C6.2
N70891: length 2.9
  TOP w0.25: DD1.18 C7.1
N70911: length 5.2
  TOP w0.25: DD1.17 14.61,112.72 13.49,113.84 C7.2 13.38,113.89
N70923: length 5.2
  TOP w0.25: C9.1 22.07,113.84 20.96,112.72 DD1.12
N70931: length 5.2
  TOP w0.25: C10.1 10.95,113.84 12.07,112.72 DD1.19
N70935: length 6.9
  TOP w0.25: DD1.20 C10.2 9.72,112.14 9.53,112.33 9.53,113.65 9.33,113.84 C11.1
N138210: length 49.2
  TOP w0.25: R5.1 6.98,65.15 6.03,66.1 6.03,91.5 8.25,93.73 18.41,93.73 19.69,95 DD1.8
N138266: length 45.4
  TOP w0.25: R7.1 7.62,68.33 6.98,68.96 6.98,90.55 8.89,92.46 19.05,92.46 20.96,94.36 DD1.9
N147373: length 2.1
  TOP w0.4: R1.2 16.51,148.97
N150163: length 9.1
  TOP w0.4: C5.2 12.53,7.54 12.07,8 X12.1 X12.2
N150323: length 8.3
  TOP w0.4: X10.2 X10.1 9.53,27.05 10.79,28.32 C4.2
N151125: length 6.5
  TOP w0.4: C1.2 X4.1 X4.2
N167535: length 4.8
  TOP w0.25: v1(11.48,79.71) 12.17,80.39 VD6.C
  BOTTOM w0.25: RR3.1 v1(11.48,79.71)
N167547: length 4.8
  TOP w0.25: VD7.C 12.07,81.66 v1(11.43,81.03)
  BOTTOM w0.25: RR3.2 v1(11.43,81.03)
N167559: length 4.8
  TOP w0.25: v1(11.43,82.3) 12.07,82.93 VD8.C
  BOTTOM w0.25: RR3.3 v1(11.43,82.3)
N167571: length 4.7
  TOP w0.25: VD9.C 12.07,84.2 v1(11.48,83.62)
  BOTTOM w0.25: RR3.4 v1(11.48,83.62)
N167911: length 4.7
  TOP w0.25: VD10.C 12.07,85.47 v1(11.48,86.06)
  BOTTOM w0.25: RR4.1 v1(11.48,86.06)
N167923: length 4.8
  TOP w0.25: VD11.C 12.07,86.74 v1(11.43,87.38)
  BOTTOM w0.25: RR4.2 v1(11.43,87.38)
N167938: length 4.8
  TOP w0.25: v1(11.43,88.65) 12.07,88.01 VD12.C
  BOTTOM w0.25: RR4.3 v1(11.43,88.65)
N167950: length 4.8
  TOP w0.25: VD13.C 12.07,89.28 11.48,89.87 v1(11.48,89.97)
  BOTTOM w0.25: RR4.4 v1(11.48,89.97)
N180484: length 6.1
  TOP w0.25: v1(12.75,175.06) 13.97,176.28 13.97,177.85 14.3,178.18 VD33.C
  BOTTOM w0.25: RR10.4 v1(12.75,175.06)
N180508: length 4.8
  TOP w0.25: v1(12.7,172.47) 13.86,173.63 14.41,173.63 15.08,174.3 VD37.C
  BOTTOM w0.25: RR10.2 v1(12.7,172.47)
N180520: length 4.1
  TOP w0.25: v1(12.75,171.15) 13.44,171.83 VD39.C
  BOTTOM w0.25: RR10.1 v1(12.75,171.15)
N181317: length 4.6
  TOP w0.25: v1(12.75,181.41) 14.61,183.26 VD23.C
  BOTTOM w0.25: RR8.4 v1(12.75,181.41)
N181329: length 4.7
  TOP w0.25: v1(12.7,180.09) 14.61,181.99 VD26.C
  BOTTOM w0.25: RR8.3 v1(12.7,180.09)
N181341: length 4.7
  TOP w0.25: v1(12.7,178.82) 14.61,180.72 VD28.C
  BOTTOM w0.25: RR8.2 v1(12.7,178.82)
N181353: length 4.7
  TOP w0.25: VD29.C 14.71,179.45 v1(12.75,177.5)
  BOTTOM w0.25: 14.28,177.5 v1(12.75,177.5)
N182020: length 5.7
  TOP w0.25: v1(12.7,173.74) 14.61,175.64 14.61,176.28 15.08,176.75 VD35.C
  BOTTOM w0.25: RR10.3 v1(12.7,173.74)
N182831: length 4.4
  TOP w0.25: v1(12.75,187.12) 13.97,188.34 VD14.C
  BOTTOM w0.25: RR5.4 v1(12.75,187.12)
N182843: length 4.5
  TOP w0.25: VD16.C 13.97,187.07 v1(12.7,185.8)
  BOTTOM w0.25: RR5.3 v1(12.7,185.8)
N182855: length 4.5
  TOP w0.25: VD18.C 13.97,185.8 v1(12.7,184.53)
  BOTTOM w0.25: RR5.2 v1(12.7,184.53)
N182867: length 4.4
  TOP w0.25: v1(12.75,183.21) 14.07,184.53 VD20.C
  BOTTOM w0.25: RR5.1 v1(12.75,183.21)
N184296: length 4.4
  TOP w0.25: v1(12.75,209.98) 14.07,208.66 VD15.C
  BOTTOM w0.25: RR6.4 v1(12.75,209.98)
N184308: length 4.5
  TOP w0.25: v1(12.7,208.66) 13.97,207.39 VD17.C
  BOTTOM w0.25: RR6.3 v1(12.7,208.66)
N184320: length 4.5
  TOP w0.25: VD19.C 13.97,206.12 v1(12.7,207.39)
  BOTTOM w0.25: RR6.2 v1(12.7,207.39)
N184332: length 4.4
  TOP w0.25: VD21.C 13.97,204.85 v1(12.75,206.07)
  BOTTOM w0.25: RR6.1 v1(12.75,206.07)
N186118: length 4.2
  TOP w0.25: v1(12.7,204.27) 13.38,203.58 VD22.C
  BOTTOM w0.25: 14.28,204.27 v1(12.7,204.27)
N186130: length 4.2
  TOP w0.25: VD24.C 13.34,202.31 v1(12.7,202.95)
  BOTTOM w0.25: RR7.3 v1(12.7,202.95)
N186142: length 4.2
  TOP w0.25: VD25.C 13.34,201.04 v1(12.7,201.68)
  BOTTOM w0.25: RR7.2 v1(12.7,201.68)
N186154: length 4.1
  TOP w0.25: v1(12.75,200.36) 13.34,199.77 VD27.C
  BOTTOM w0.25: RR7.1 v1(12.75,200.36)
N187066: length 3.9
  TOP w0.25: VD30.C 14.3,198.5 14.25,198.55 v1(12.75,198.55)
  BOTTOM w0.25: RR9.4 v1(12.75,198.55)
N187078: length 3.9
  TOP w0.25: v1(12.7,197.23) VD31.C
  BOTTOM w0.25: RR9.3 v1(12.7,197.23)
N187090: length 3.9
  TOP w0.25: VD34.C 14.3,194.69 14.25,194.64 v1(12.75,194.64)
  BOTTOM w0.25: RR9.1 v1(12.75,194.64)
N187102: length 3.9
  TOP w0.25: v1(12.7,195.96) VD32.C
  BOTTOM w0.25: RR9.2 v1(12.7,195.96)
N188421: length 4.1
  TOP w0.25: VD36.C 15.04,193.46 13.37,193.46 v1(12.75,192.84)
  BOTTOM w0.25: RR11.4 v1(12.75,192.84)
N188433: length 4.2
  TOP w0.25: v1(12.7,191.52) 13.34,192.15 VD38.C
  BOTTOM w0.25: RR11.3 v1(12.7,191.52)
N188446: length 4.2
  TOP w0.25: VD40.C 13.34,190.88 v1(12.7,190.25)
  BOTTOM w0.25: RR11.2 v1(12.7,190.25)
N188461: length 4.1
  TOP w0.25: v1(12.75,188.93) 13.44,189.61 VD41.C
  BOTTOM w0.25: RR11.1 v1(12.75,188.93)

## Copper pours and planes (outline as drawn; the poured copper is in the pictures)
GNDE on TOP, BOTTOM: 28.46,129.24 28.46,106.44 6.35,106.43 6.35,128.65 6.35,128.65 6.98,129.28
GND on TOP: 2.14,2 2.07,2.05 2,2.11 2,231.04 28.48,231.04 28.48,2.11 28.41,2.05 28.34,2 ; 1 cut-out
GND on BOTTOM: 2.14,2 2.07,2.05 2,2.11 2,231.04 28.48,231.04 28.48,2.11 28.41,2.05 28.34,2 ; 2 cut-outs
N167535 on BOTTOM (solid shape): 13.67,79.71 13.07,79.13 12.52,79.63 12.49,79.71 12.52,79.78 13.07,80.28
N167571 on BOTTOM (solid shape): 13.67,83.62 13.07,83.04 12.52,83.54 12.49,83.62 12.52,83.69 13.07,84.19
N167911 on BOTTOM (solid shape): 13.67,86.06 13.07,85.48 12.52,85.98 12.49,86.06 12.52,86.13 13.07,86.63
N167950 on BOTTOM (solid shape): 13.67,89.97 13.07,89.39 12.52,89.89 12.49,89.97 12.52,90.04 13.07,90.54
N180484 on BOTTOM (solid shape): 14.31,175.06 13.7,174.48 13.15,174.98 13.13,175.06 13.15,175.13 13.7,175.63
N180520 on BOTTOM (solid shape): 14.31,171.15 13.7,170.57 13.15,171.07 13.13,171.15 13.15,171.22 13.7,171.72
N181317 on BOTTOM (solid shape): 14.31,181.41 13.7,180.83 13.15,181.33 13.13,181.41 13.15,181.48 13.7,181.98
N181353 on TOP (solid shape): 15.1,179.47 15.48,178.98 14.23,178.85 14.13,178.91 14.12,179.03 14.68,179.93
N181353 on BOTTOM (solid shape): 14.31,177.5 13.7,176.92 13.15,177.42 13.13,177.5 13.15,177.57 13.7,178.07
N182020 on TOP (solid shape): 15.09,176.94 15.48,176.44 14.69,176.22 14.59,176.25 14.55,176.35 14.68,177.39
N182831 on BOTTOM (solid shape): 14.31,187.12 13.7,186.55 13.15,187.04 13.13,187.12 13.15,187.2 13.7,187.7
N182867 on BOTTOM (solid shape): 14.31,183.21 13.7,182.64 13.15,183.13 13.13,183.21 13.15,183.29 13.7,183.79
N184296 on BOTTOM (solid shape): 14.31,209.98 13.7,209.41 13.15,209.9 13.13,209.98 13.15,210.06 13.7,210.56
N184332 on BOTTOM (solid shape): 14.31,206.07 13.7,205.5 13.15,205.99 13.13,206.07 13.15,206.15 13.7,206.65
N186118 on BOTTOM (solid shape): 14.31,204.27 13.7,203.69 13.15,204.19 13.13,204.27 13.15,204.34 13.7,204.84
N186154 on BOTTOM (solid shape): 14.31,200.36 13.7,199.78 13.15,200.28 13.13,200.36 13.15,200.43 13.7,200.93
N187066 on BOTTOM (solid shape): 14.31,198.55 13.7,197.98 13.15,198.47 13.13,198.55 13.15,198.63 13.7,199.13
N187090 on BOTTOM (solid shape): 14.31,194.64 13.7,194.07 13.15,194.56 13.13,194.64 13.15,194.72 13.7,195.22
N188421 on BOTTOM (solid shape): 14.31,192.84 13.7,192.26 13.15,192.76 13.13,192.84 13.15,192.91 13.7,193.41
N188461 on BOTTOM (solid shape): 14.31,188.93 13.7,188.35 13.15,188.85 13.13,188.93 13.15,189 13.7,189.5

Small or netless copper shapes (teardrops, artwork), in the pictures only: 107 on TOP, 36 on BOTTOM

## Text on the board
Ref Des/Silkscreen Top: #APRM | #CPRD | #WARN | SOUT0 | #CS2 | #APRD | #ADEF | #CPRM | #CS3 | ALARM | #CS0 | #RES | #CS1 | D15 | #RD | D10 | D11 | D12 | D13 | D14 | BR0 | BR3 | BW0 | BW3 | BR1 | BR2 | #WR | BW1 | BW2 | D0 | D1 | D2 | D3 | D4 | D5 | D6 | D7 | A3 | D8 | D9 | A0 | A1 | A2 | BL | C1 | TALK | OUT | IN | TX | RX | +5B | GND | COM | GNDA | GNDE | TEST-BSP_01v1 | May 2013
DEVICE_TYPE_TOP: KPRM_02v1 | January 2013
DEVICE_TYPE_BOTTOM: FIGURE | SIZE | 0.5 | 0.85 | 1.0 | 2.0 | 3.2 | DRILL CHART: TOP to BOTTOM | ALL UNITS ARE IN MILLIMETERS | PLATED | QTY | 188 | 2 | 222 | 1 | 6
